# EAGLE board HR2M (EAGLE 7.6.0)
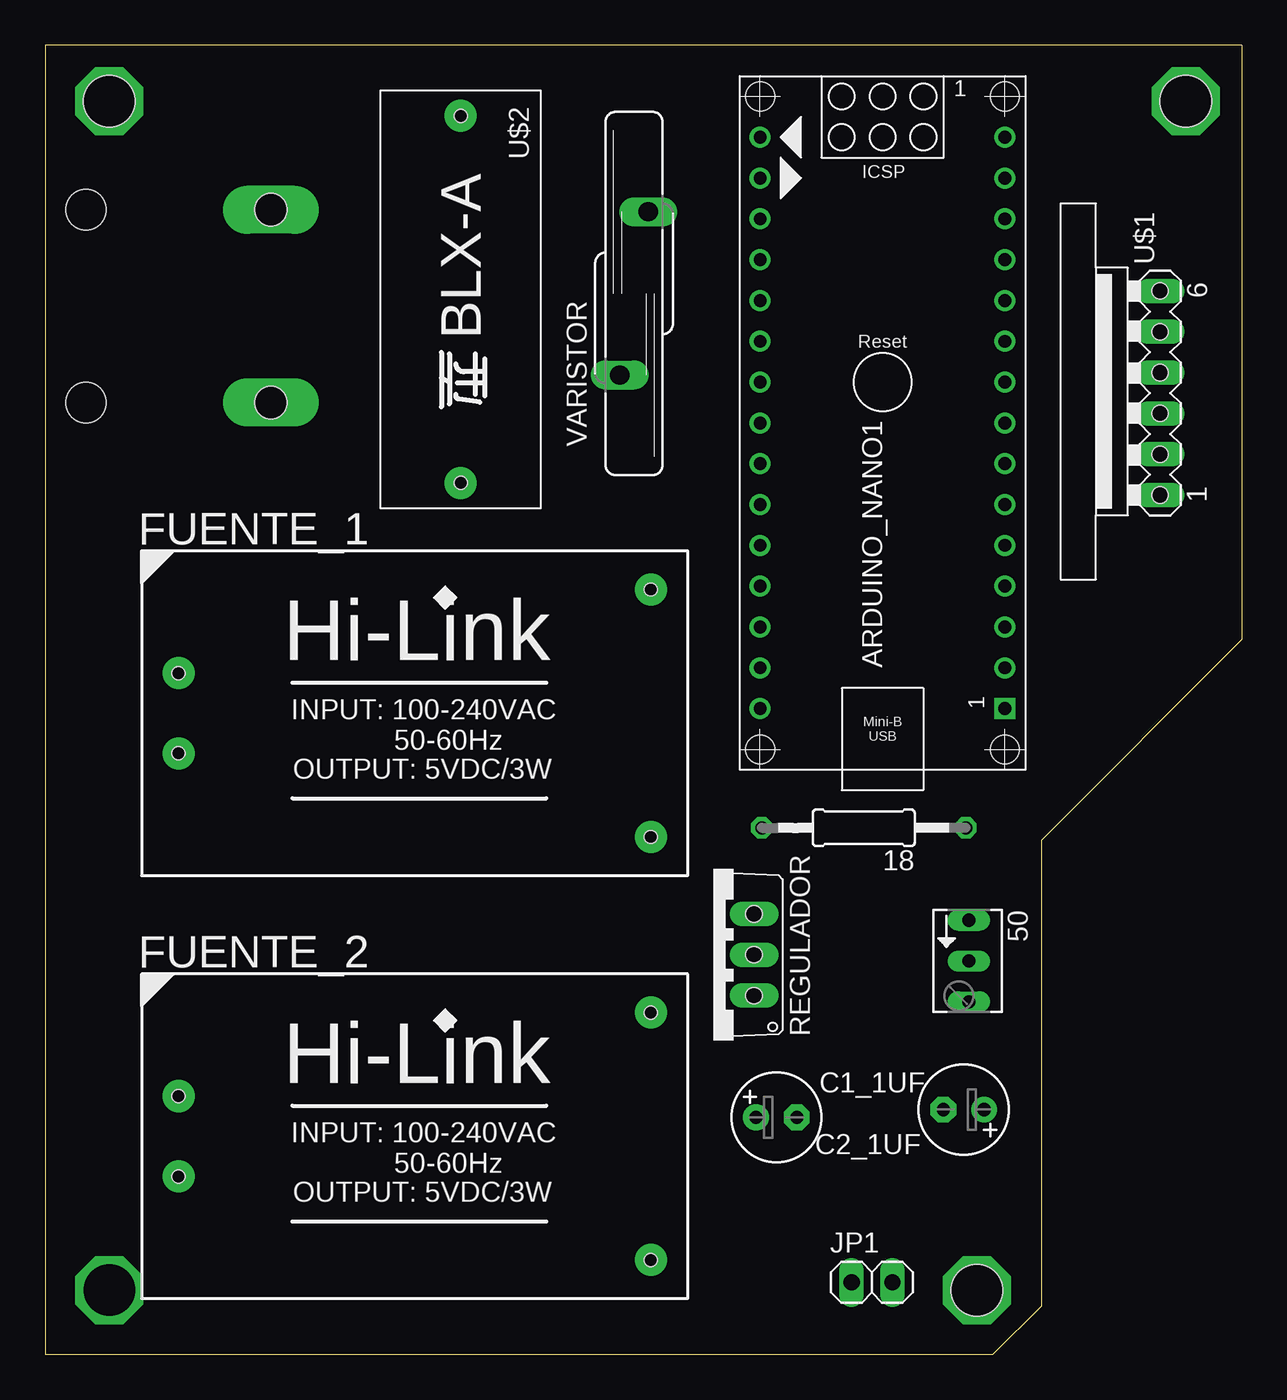
[diagram p0: board, top side]
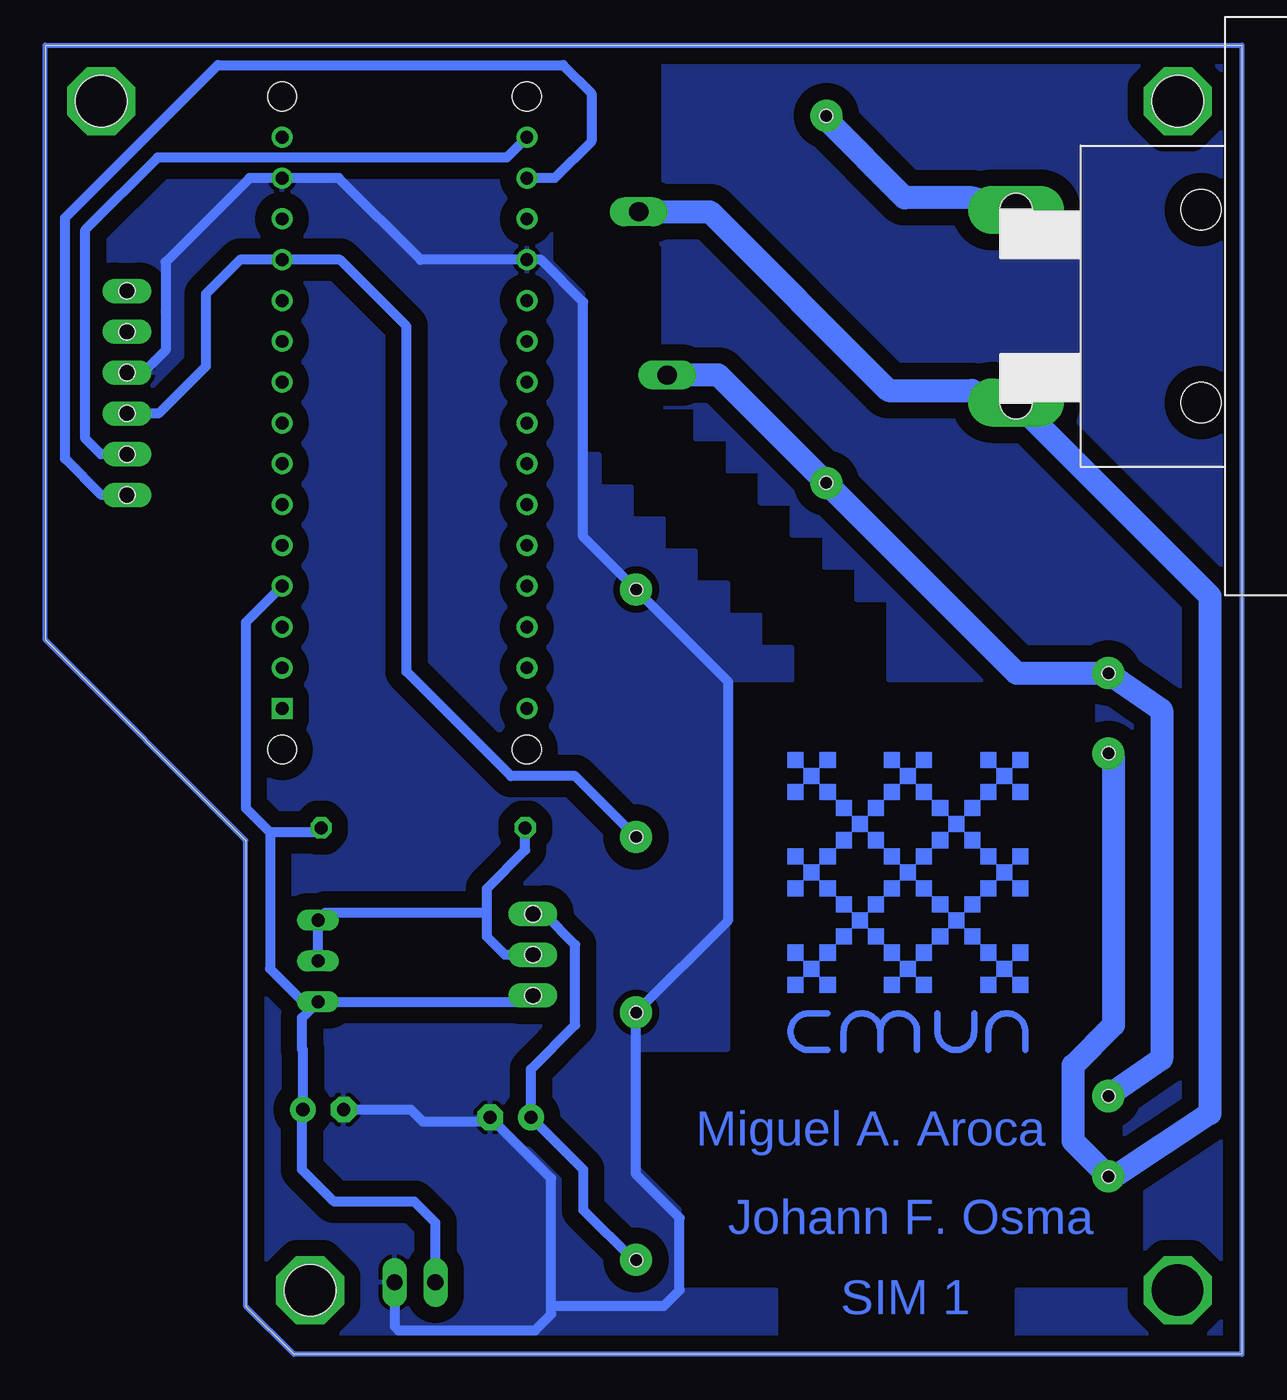
[diagram p1: board, bottom side, seen from below]

Size 74.5 x 81.5 mm. Coordinates in mm from the lower left corner, seen from the top.
Outline: 0,0 59,0 62,3 62,32 74.5,44.5 74.5,81.5 0,81.5 0,0
Copper layers (1*16): Top 0.035mm / dielectric 1.5mm / Bottom 0.035mm
Design rules "SIM1": minimum track width 10mil, minimum drill 24mil, track to track 0.205mm, track to pad 0.205mm, pad to pad 0.205mm, via to via 0.205mm, smd to smd 8mil, copper to edge 40mil, drill to drill 8mil, minimum pad ring 10mil, minimum via ring 8mil, stop-mask expansion 4mil, vias tented up to drill 0mil, thermal gap 10mil
Net classes: 0 default: clearance 0.205 mm
Holes 3.2 mm at 4,78 71,78 58,4

## Footprints (pad centres in the part's own frame; a part is rotated, then mirrored left to right if it is on the bottom)
0207/12 = drill 0.813 octagon: 1 -6.35,0; 2 6.35,0
B64Y = drill 0.813 long: A 2.54,0; E -2.54,0; S 0,0
ARDUINO_NANO = drill 0.8 square: 1 -20.32,-7.62 | drill 0.8: 2 -17.78,-7.62; 3 -15.24,-7.62; 4 -12.7,-7.62; 5 -10.16,-7.62; 6 -7.62,-7.62; 7 -5.08,-7.62; 8 -2.54,-7.62; 9 0,-7.62; 10 2.54,-7.62; 11 5.08,-7.62; 12 7.62,-7.62; 13 10.16,-7.62; 14 12.7,-7.62; 15 15.24,-7.62; 16 15.24,7.62; 17 12.7,7.62; 18 10.16,7.62; 19 7.62,7.62; 20 5.08,7.62; 21 2.54,7.62; 22 0,7.62; 23 -2.54,7.62; 24 -5.08,7.62; 25 -7.62,7.62; 26 -10.16,7.62; 27 -12.7,7.62; 28 -15.24,7.62; 29 -17.78,7.62; 30 -20.32,7.62 | hole 1.778: -22.86,-7.62; -22.86,7.62; 17.78,7.62; 17.78,-7.62
E2,5-6 = drill 0.813 pad 1.6: + -1.27,0 | drill 0.813 pad 1.6 octagon: - 1.27,0
NARKEN_NK8-13 = drill 2 pad 3 long: 1 -6,-12; 2 6,-12 | hole 2: -6,-12; 6,-12 | hole 2.5: -6,-0.5; 6,-0.5
HLK-PM01 = drill 0.8 pad 2: +VO_4 15.19,-7.76; -VO_3 15.19,7.64; AC_1 -14.21,2.44; AC_2 -14.21,-2.56 | hole 0.8: -14.21,2.44; -14.21,-2.56; 15.19,7.64; 15.19,-7.76
1X02 = drill 1.016 long: 1 -1.27,0; 2 1.27,0
TO220V = drill 1.016 long: 1 -2.54,0; 2 0,0; 3 2.54,0 | hole 1: -2.54,0; 0,0; 2.54,0
HC-0X_V = drill 1.016 long: 1 -6.35,-2.54; 2 -3.81,-2.54; 3 -1.27,-2.54; 4 1.27,-2.54; 5 3.81,-2.54; 6 6.35,-2.54 | hole 1: -6.35,-2.54; -3.81,-2.54; -1.27,-2.54; 1.27,-2.54; 3.81,-2.54; 6.35,-2.54
PORTA_FUSIBLE = drill 0.8 pad 2: 1 -11.43,0; 2 11.43,0 | hole 0.8: -11.43,0; 11.43,0
S20K11 = drill 1.194 long: 1 -0.889,-5.08; 2 0.889,5.08

## Placement (x,y rotation side)
18  [0207/12]  50.96,32.78 180 top
50  [B64Y]  57.51,24.49 270 top
ARDUINO_NANO1  [ARDUINO_NANO]  52.13,60.52 90 top
C1_1UF  [E2,5-6]  45.52,14.76 0 top
C2_1UF  [E2,5-6]  57.18,15.24 180 top
ENTRADA  NARKEN_NK8-13  [NARKEN_NK8-13]  2.05,65.25 270 bottom
FUENTE_1  HLK-PM01  [HLK-PM01]  22.52,39.97 0 top
FUENTE_2  HLK-PM01  [HLK-PM01]  22.52,13.64 0 top
JP1  [1X02]  51.47,4.49 0 top
REGULADOR  LM317T  [TO220V]  44.13,24.88 90 top
U$1  HC-05  [HC-0X_V]  66.87,59.84 90 top
U$2  PORTA_FUSIBLE  [PORTA_FUSIBLE]  25.87,65.67 270 top
VARISTOR  S20K11  [S20K11]  36.66,66.04 0 top

## Library data of the parts
18 C1_1UF C2_1UF = resistor
50 = pot
ARDUINO_NANO1 = ArduinoNanoV30
ENTRADA = personal; CURRENT: 2.5A; VOLTAGE: 250V
FUENTE_1 FUENTE_2 REGULADOR U$1 U$2 = personal
JP1 = pinhead
VARISTOR = varistor

## Nets
GND: ARDUINO_NANO1.14 ARDUINO_NANO1.19 C1_1UF.- C2_1UF.- FUENTE_1.-VO_3 FUENTE_2.-VO_3 JP1.2 U$1.4
N$1: ENTRADA.1 U$2.1
N$2: ARDUINO_NANO1.12 FUENTE_1.+VO_4 U$1.3
N$3: ENTRADA.2 FUENTE_1.AC_2 FUENTE_2.AC_2 VARISTOR.2
N$4: ARDUINO_NANO1.17 U$1.1
N$5: FUENTE_1.AC_1 FUENTE_2.AC_1 U$2.2 VARISTOR.1
N$6: ARDUINO_NANO1.16 U$1.2
N$7: C1_1UF.+ FUENTE_2.+VO_4 REGULADOR.3
N$9: 18.1 50.A ARDUINO_NANO1.4 C2_1UF.+ JP1.1 REGULADOR.1
N$10: 18.2 50.E 50.S REGULADOR.2
VIN: ARDUINO_NANO1.15

## Tracks (layer width: path | path; a pad name or v marks a point on that pad's centre or on a via)
GND
  Bottom 0.61: C2_1UF.- 51.74,15.24 51,14.5 47.05,14.5 C1_1UF.- 43,10.97 43,3 | JP1.2 52.74,1.74 52.5,1.5 44,1.5 43,2.5 43,3 | 43,3 36,3 35,4 35,8.5 37.71,11.21 FUENTE_2.-VO_3 32,26.99 32,41.9 FUENTE_1.-VO_3 41,50.9 41,65.5 43.64,68.14 ARDUINO_NANO1.19 51.14,68.14 56.22,73.22 ARDUINO_NANO1.14 61.78,73.22 67,68 67,62.5 68.39,61.11 U$1.4
  pour Bottom (isolate 1.016): 43,71 43,73 40,76 38,76 36,78 38,80 36.5,81.5 74.5,81.5 74.5,44.5 62,32 62,3 59,0 29,0 29,4 35,4 35,9 38,12 38,19 32,19 32,42 28,42 28,44 30,44 30,46 32,46 32,48 34,48 34,50 36,50 36,52 38,52 38,54 40,54 40,56 41,56 41,66 43,68
N$1
  Bottom 0.61: 25.87,76.87 U$2.1
  Bottom 1.422: ENTRADA.1 16.8,72 21,72 25.87,76.87
N$2
  Bottom 0.61: FUENTE_1.+VO_4 41.5,36 45.5,36 52,42.5 52,64 56.14,68.14 ARDUINO_NANO1.12 62.36,68.14 64.5,66 64.5,61.5 67.43,58.57 U$1.3
N$3
  Bottom 0.61: FUENTE_1.AC_2 8,37.1 | 7.92,11.08 FUENTE_2.AC_2
  Bottom 1.422: VARISTOR.2 33.12,71.12 22,60 16.8,60 ENTRADA.2 2,47.2 2,15 7.92,11.08 | 8,37.1 8,20.5 10.5,18 10.5,13.27 FUENTE_2.AC_2
N$4
  Bottom 0.61: U$1.1 70.99,53.49 73.25,55.75 73.25,70.75 63.75,80.25 42.25,80.25 40.5,78.5 40.5,75.5 42.78,73.22 ARDUINO_NANO1.17
N$5
  Bottom 1.422: FUENTE_2.AC_1 5,18.39 5,40.1 FUENTE_1.AC_1 14.04,42.41 U$2.2 32.59,60.96 VARISTOR.1
N$6
  Bottom 0.61: U$1.2 71.03,56.03 72,57 72,70 67.5,74.5 45.77,74.5 ARDUINO_NANO1.16
N$7
  Bottom 0.61: FUENTE_2.+VO_4 37.88,5.88 41,9 41,11.51 C1_1UF.+ 44.25,17.75 41.5,20.5 41.5,25.5 43.42,27.42 REGULADOR.3
N$8
  Bottom 0.406: 25.81,21.23 26.95,21.23 arc-180 26.95,18.95 25.81,18.95
N$9
  Bottom 0.61: JP1.1 50.2,8.2 51.5,9.5 56.5,9.5 58.5,11.5 58.5,15.19 C2_1UF.+ 58.45,18.95 arc-90 58.5,19 58.5,20.96 50.A | 50.A 44.52,21.95 REGULADOR.1 | 60.5,32.5 60.5,24 58.45,21.95 50.A | ARDUINO_NANO1.4 62,45.57 62,34 60.5,32.5 | 18.1 57.59,32.5 60.5,32.5
N$10
  Bottom 0.61: REGULADOR.2 45.88,24.88 47,26 47,27.5 | 47,27.5 47,29 44.61,31.39 18.2 | 47,27.5 57.04,27.5 50.E 57.51,24.51 50.S
N$11
  Bottom 0.406: 22.51,18.95 22.51,20.09 arc-180 24.79,20.09 24.79,18.95
N$12
  Bottom 0.406: 20.22,18.95 20.22,20.09 arc-180 22.51,20.09 22.51,18.95
N$13
  Bottom 0.406: 18.95,21.23 18.95,20.09 arc-180 16.66,20.09 16.66,21.23
N$14
  Bottom 0.406: 13.49,18.95 13.49,20.09 arc-180 15.78,20.09 15.78,18.95
N$15
  Bottom 0.305: 0,0 59,0 62,3 62,32 74.5,44.5 74.5,81.5 0,81.5 0,0
N$16  (via drill 3.2)
  other vias: 58,4
N$17  (via drill 3.2)
  other vias: 71,78
N$18  (via drill 3.2)
  other vias: 4,4
N$19  (via drill 3.2)
  other vias: 4,78
N$20
  pour Bottom (isolate 1.016): 0,81.5 36,81.5 36,75 36,73 37,72 37,70 36,69 36,59 34,59 34,57 32,57 32,55 30,55 30,53 28,53 28,51 26,51 26,49 24,49 24,47 22,47 22,42 14,42 10,42 9,42 9,14 9,13 6,13 6,4 14,4 14,0 0,0 0,81
(copper drawn outside any net)
  shapes: Bottom area x73

## Text on the board
Bottom: Miguel A. Aroca | Johann F. Osma | SIM 1